# EAGLE board projeto eletrico - Estacionamento inteligente (EAGLE 9.7.0)

Size 428.6 x 405.91 mm. Coordinates in mm from the lower left corner, seen from the top.
Outline: 0,0 428.6,0 428.6,405.91 0,405.91 0,0
Copper layers (1*16): Top 0.035mm / dielectric 1.5mm / Bottom 0.035mm
Design rules "default": minimum track width 6mil, minimum drill 0.35mm, track to track 6mil, track to pad 6mil, pad to pad 6mil, via to via 6mil, smd to smd 6mil, copper to edge 40mil, drill to drill 6mil, minimum pad ring 10mil, minimum via ring 8mil, stop-mask expansion 4mil, vias tented up to drill 0mil, thermal gap 10mil

## Footprints (pad centres in the part's own frame; a part is rotated, then mirrored left to right if it is on the bottom)
LEDRD254W60D565H860B = drill 0.981 pad 1.581: 1 -1.27,0; 2 1.27,0
LEDRD254W60D565H860B_G = drill 0.981 pad 1.581: 1 -1.27,0; 2 1.27,0
28015 = drill 1.016 long: 1 -2.54,0; 2 0,0; 3 2.54,0
RESAD1016W63L850D250B = drill 0.83 pad 1.43: 1 -5.08,0; 2 5.08,0
SG90 = drill 1.016 long: 1 -2.54,0; 2 0,0; 3 2.54,0
DIP762W53P254L1969H508Q14B = drill 0.743 pad 1.343: 1 -3.81,7.62; 2 -3.81,5.08; 3 -3.81,2.54; 4 -3.81,0; 5 -3.81,-2.54; 6 -3.81,-5.08; 7 -3.81,-7.62; 8 3.81,-7.62; 9 3.81,-5.08; 10 3.81,-2.54; 11 3.81,0; 12 3.81,2.54; 13 3.81,5.08; 14 3.81,7.62
LCD-I2C = drill 1.016 long: 1 -19.05,-5.08; 2 -19.05,-7.62; 3 -19.05,-10.16; 4 -19.05,-12.7
ARDUINO-UNO-R3-SHIELD = drill 1.016 pad 1.88: 3.3V 24.13,-2.54; 5V 24.13,0; A0 24.13,12.7; A1 24.13,15.24; A2 24.13,17.78; A3 24.13,20.32; A4 24.13,22.86; A5 24.13,25.4; AREF -24.13,-13.97; D2 -24.13,20.32; D3 -24.13,17.78; D4 -24.13,15.24; D5 -24.13,12.7; D6 -24.13,10.16; D7 -24.13,7.62; D8 -24.13,3.81; D9 -24.13,1.27; D10 -24.13,-1.27; D11 -24.13,-3.81; D12 -24.13,-6.35; D13 -24.13,-8.89; GND@0 24.13,2.54; GND@1 24.13,5.08; GND@2 -24.13,-11.43; IOREF 24.13,-7.62; NC 24.13,-10.16; RES 24.13,-5.08; RX -24.13,25.4; SCL -24.13,-19.05; SDA -24.13,-16.51; TX -24.13,22.86; VIN 24.13,7.62

## Placement (x,y rotation side)
D1  RED  [LEDRD254W60D565H860B]  361.58,159.4 180 top
D2  RED  [LEDRD254W60D565H860B]  369.2,159.4 180 top
D3  RED  [LEDRD254W60D565H860B]  376.82,159.4 180 top
D4  RED  [LEDRD254W60D565H860B]  384.44,159.4 180 top
D5  RED  [LEDRD254W60D565H860B]  392.06,159.4 180 top
D6  RED  [LEDRD254W60D565H860B]  399.68,159.4 180 top
D7  RED  [LEDRD254W60D565H860B]  407.3,159.4 180 top
D8  RED  [LEDRD254W60D565H860B]  414.92,159.4 180 top
D9  RED  [LEDRD254W60D565H860B]  422.54,159.4 180 top
D10  GREEN  [LEDRD254W60D565H860B_G]  373.88,305.82 180 top
D11  GREEN  [LEDRD254W60D565H860B_G]  374.06,38.29 180 top
D13  RED  [LEDRD254W60D565H860B]  412.16,38.29 180 top
D15  RED  [LEDRD254W60D565H860B]  411.98,305.82 180 top
PING2  DISTANCE-SENSOR-3PIN  [28015]  318.77,26.04 90 top
PING3  DISTANCE-SENSOR-3PIN  [28015]  153.05,290.54 270 top
R1  1k  [RESAD1016W63L850D250B]  367.93,146.7 90 top
R2  1k  [RESAD1016W63L850D250B]  375.55,146.7 90 top
R3  1k  [RESAD1016W63L850D250B]  383.17,146.7 90 top
R4  1k  [RESAD1016W63L850D250B]  390.79,146.7 90 top
R5  1k  [RESAD1016W63L850D250B]  398.41,146.7 90 top
R6  1k  [RESAD1016W63L850D250B]  406.03,146.7 90 top
R7  1k  [RESAD1016W63L850D250B]  360.31,146.7 90 top
R8  1k  [RESAD1016W63L850D250B]  413.65,146.7 90 top
R9  1k  [RESAD1016W63L850D250B]  421.27,146.7 90 top
R10  1k  [RESAD1016W63L850D250B]  372.61,290.58 90 top
R11  1k  [RESAD1016W63L850D250B]  372.79,23.05 90 top
R12  1k  [RESAD1016W63L850D250B]  410.89,23.05 90 top
R13  1k  [RESAD1016W63L850D250B]  410.71,290.58 90 top
SERVO1  SERVOSG90  [SG90]  235.45,47.76 0 top
SERVO2  SERVOSG90  [SG90]  236.9,265.23 180 top
U1  74HC04_PDIP  [DIP762W53P254L1969H508Q14B]  393.11,24.32 90 top
U2  74HC04_PDIP  [DIP762W53P254L1969H508Q14B]  392.93,291.85 90 top
U7  LCD-16X2-I2CSUNFOUNDER-IIC  [LCD-I2C]  139.61,398.36 0 top
UGESTOR  ARDUINO-UNO-R3-SHIELD  [ARDUINO-UNO-R3-SHIELD]  287.06,170.53 180 top
UPORTEIRO  ARDUINO-UNO-R3-SHIELD  [ARDUINO-UNO-R3-SHIELD]  29.84,183.87 180 top

## Library data of the parts
D1-D9 D13 D15 = Tinkercad; CATEGORY: Opto-Electronic; SUB-CATEGORY: LED; VALUE: LED_RED
D10 D11 = Tinkercad; CATEGORY: Opto-Electronic; SUB-CATEGORY: LED; VALUE: LED_GREEN
PING2 PING3 R1-R13 SERVO1 SERVO2 U1 U2 U7 UGESTOR UPORTEIRO = Tinkercad

## Nets
D1_C: D1.2 R7.2
D2_C: D2.2 R1.2
D3_C: D3.2 R2.2
D4_C: D4.2 R3.2
D5_C: D5.2 R4.2
D6_C: D6.2 R5.2
D7_C: D7.2 R6.2
D8_C: D8.2 R8.2
D9_C: D9.2 R9.2
D10_C: D10.2 R10.2
D11_C: D11.2 R11.2
D13_C: D13.2 R12.2
D15_C: D15.2 R13.2
U1_1Y: D13.1 U1.2
U2_1Y: D15.1 U2.2
UGESTOR_5V: U1.14 U2.14 U7.2 UGESTOR.5V
UGESTOR_D2: D9.1 UGESTOR.D2
UGESTOR_D3: D8.1 UGESTOR.D3
UGESTOR_D4: D7.1 UGESTOR.D4
UGESTOR_D5: D6.1 UGESTOR.D5
UGESTOR_D6: D5.1 UGESTOR.D6
UGESTOR_D7: D4.1 UGESTOR.D7
UGESTOR_D8: D3.1 UGESTOR.D8
UGESTOR_D9: D2.1 UGESTOR.D9
UGESTOR_D10: D1.1 UGESTOR.D10
UGESTOR_D11: D11.1 U1.1 UGESTOR.D11
UGESTOR_D12: D10.1 U2.1 UGESTOR.D12
UGESTOR_SCL: U7.4 UGESTOR.SCL
UGESTOR_SDA: U7.3 UGESTOR.SDA
UPORTEIRO_5V: PING2.2 PING3.2 SERVO1.2 SERVO2.2 UPORTEIRO.5V
UPORTEIRO_D2: PING2.3 UPORTEIRO.D2
UPORTEIRO_D3: PING3.3 UPORTEIRO.D3
UPORTEIRO_D4: SERVO1.3 UPORTEIRO.D4
UPORTEIRO_D5: SERVO2.3 UPORTEIRO.D5
UPORTEIRO_GND: PING2.1 PING3.1 R1.1 R2.1 R3.1 R4.1 R5.1 R6.1 R7.1 R8.1 R9.1 R10.1 R11.1 R12.1 R13.1 SERVO1.1 SERVO2.1 U1.7 U2.7 U7.1 UGESTOR.GND@0 UGESTOR.GND@1 UGESTOR.GND@2 UPORTEIRO.GND@0 UPORTEIRO.GND@1 UPORTEIRO.GND@2
UPORTEIRO_RX: UGESTOR.TX UPORTEIRO.RX
UPORTEIRO_TX: UGESTOR.RX UPORTEIRO.TX

## Tracks (layer width: path | path; a pad name or v marks a point on that pad's centre or on a via)
D1_C  (1 unrouted)
D2_C  (1 unrouted)
D3_C  (1 unrouted)
D4_C  (1 unrouted)
D5_C  (1 unrouted)
D6_C  (1 unrouted)
D7_C  (1 unrouted)
D8_C  (1 unrouted)
D9_C  (1 unrouted)
D10_C  (1 unrouted)
D11_C  (1 unrouted)
D13_C  (1 unrouted)
D15_C  (1 unrouted)
U1_1Y  (1 unrouted)
U2_1Y  (1 unrouted)
UGESTOR_5V  (3 unrouted)
UGESTOR_D2  (1 unrouted)
UGESTOR_D3  (1 unrouted)
UGESTOR_D4  (1 unrouted)
UGESTOR_D5  (1 unrouted)
UGESTOR_D6  (1 unrouted)
UGESTOR_D7  (1 unrouted)
UGESTOR_D8  (1 unrouted)
UGESTOR_D9  (1 unrouted)
UGESTOR_D10  (1 unrouted)
UGESTOR_D11  (2 unrouted)
UGESTOR_D12  (2 unrouted)
UGESTOR_SCL  (1 unrouted)
UGESTOR_SDA  (1 unrouted)
UPORTEIRO_5V  (4 unrouted)
UPORTEIRO_D2  (1 unrouted)
UPORTEIRO_D3  (1 unrouted)
UPORTEIRO_D4  (1 unrouted)
UPORTEIRO_D5  (1 unrouted)
UPORTEIRO_GND  (25 unrouted)
UPORTEIRO_RX  (1 unrouted)
UPORTEIRO_TX  (1 unrouted)